# Altium PCB PCB1.PcbDoc
Units mil, origin at the board's own origin, x right, y up, seen from the top; angles counter-clockwise.
Board outline 5520 x 2975 mil, 2 copper layers (Top Layer, Bottom Layer); 37 components, 41 nets, 228 pads, 2 vias.
Unrouted connection lines stored in the file: 2.
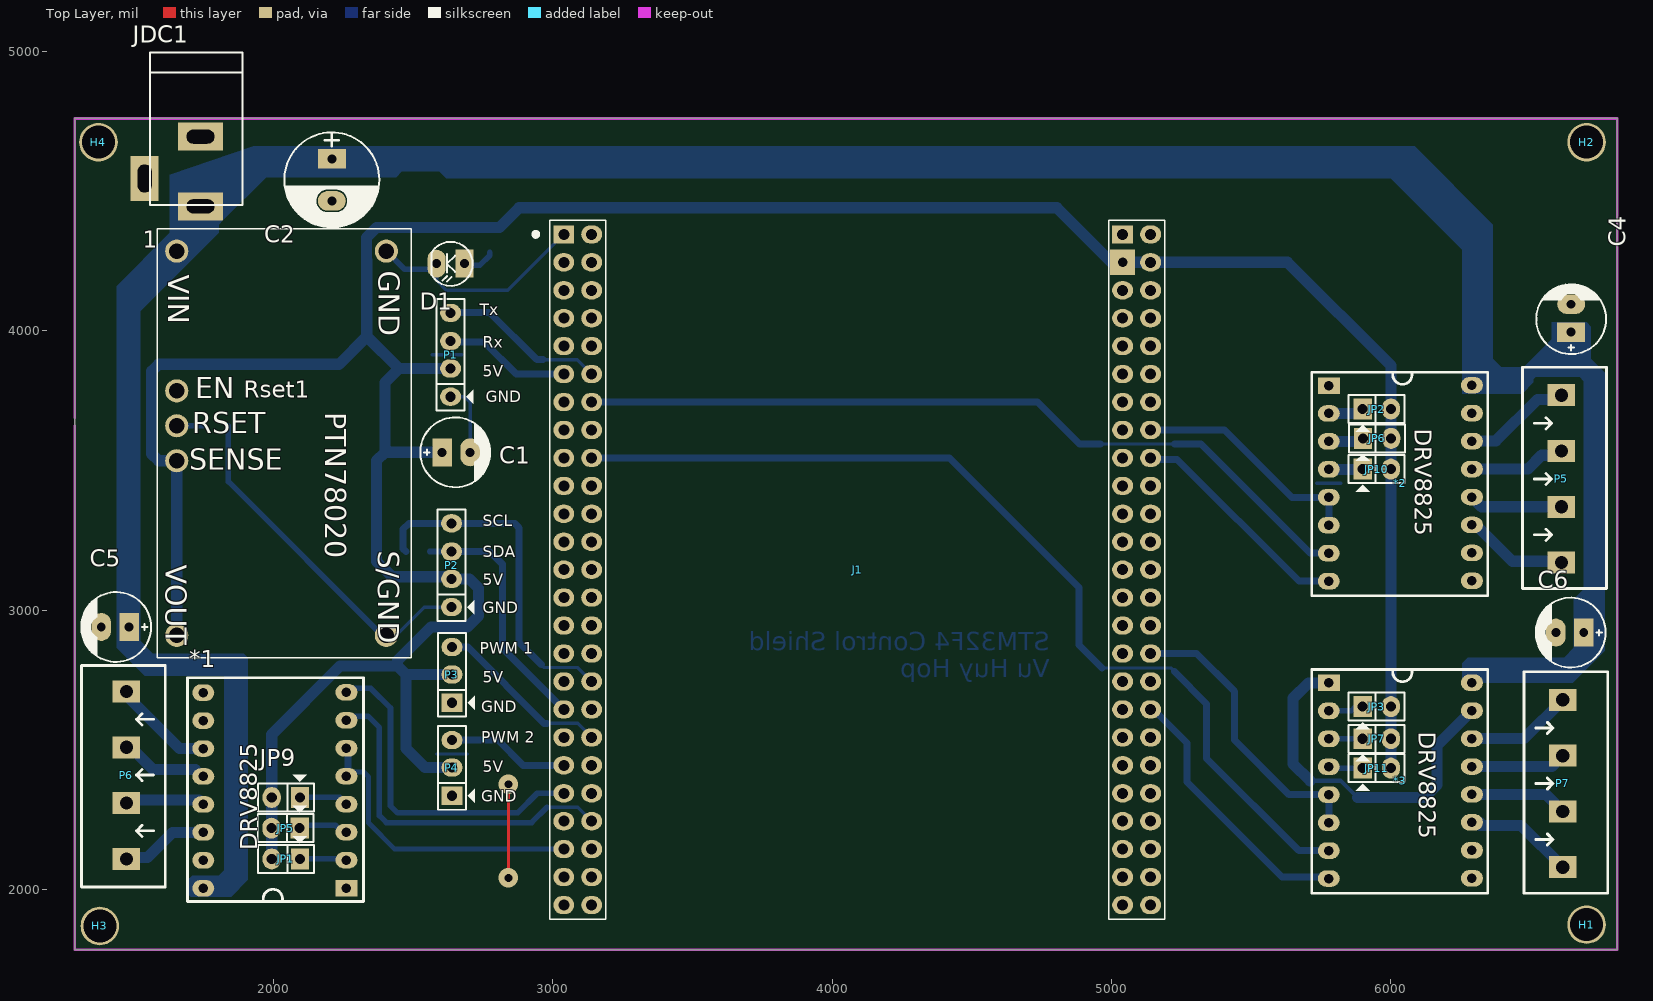
[diagram p0: Top Layer view]
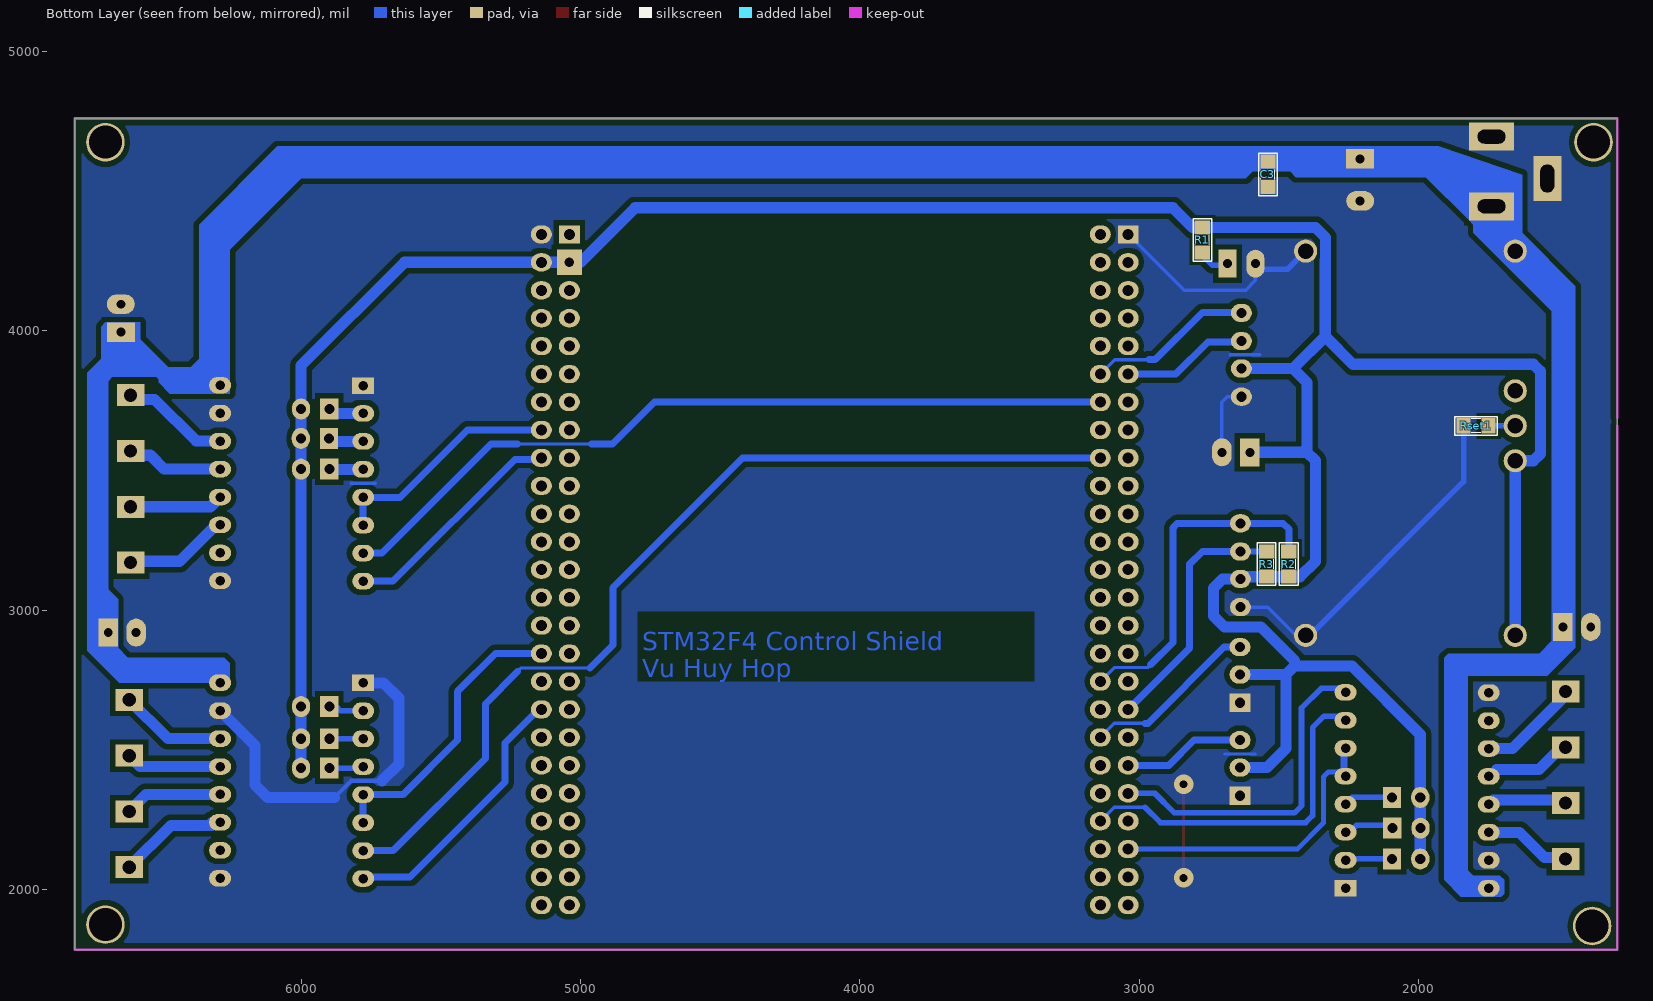
[diagram p1: Bottom Layer view, seen from below]
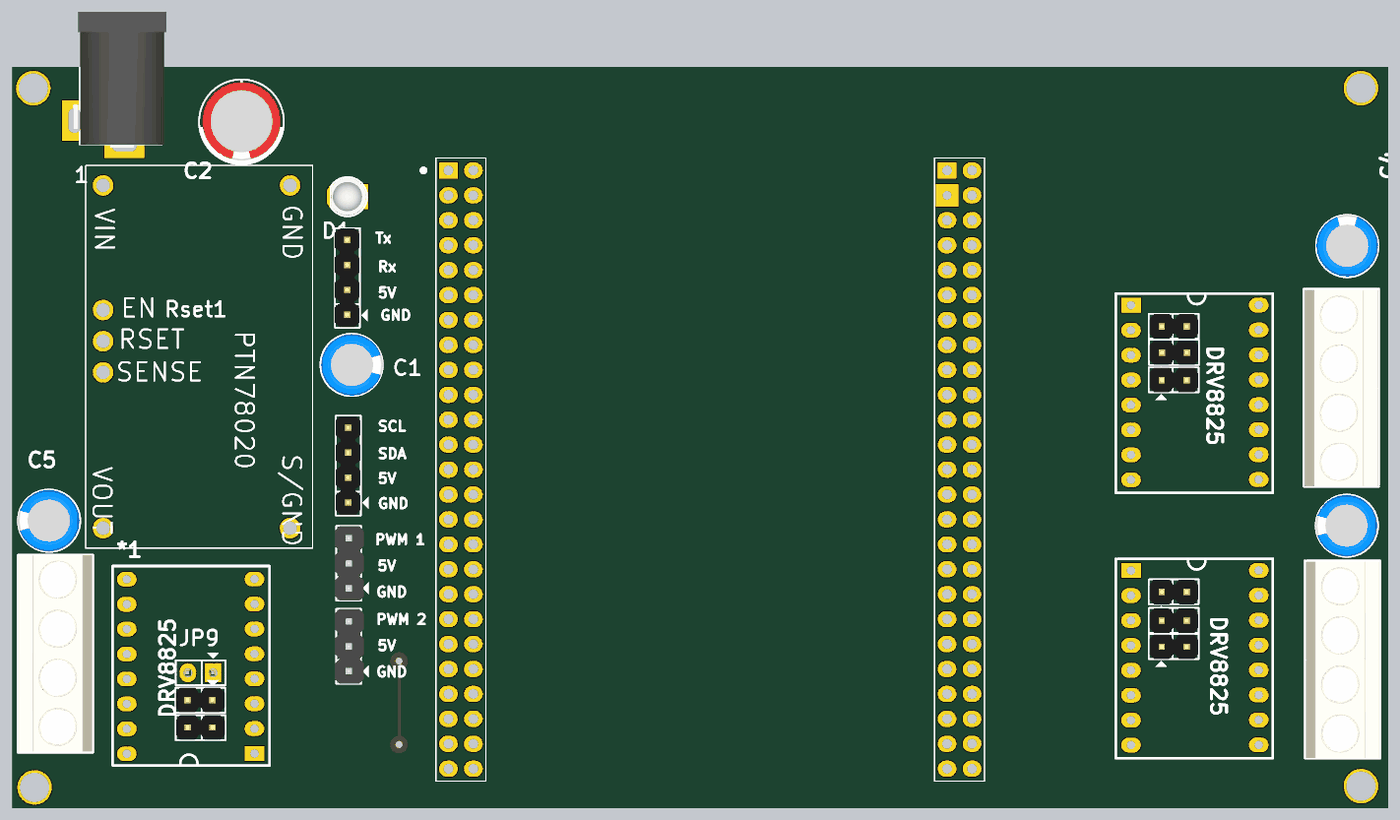
[diagram p2: 3D render of the assembled board from above, using the file's embedded part models]
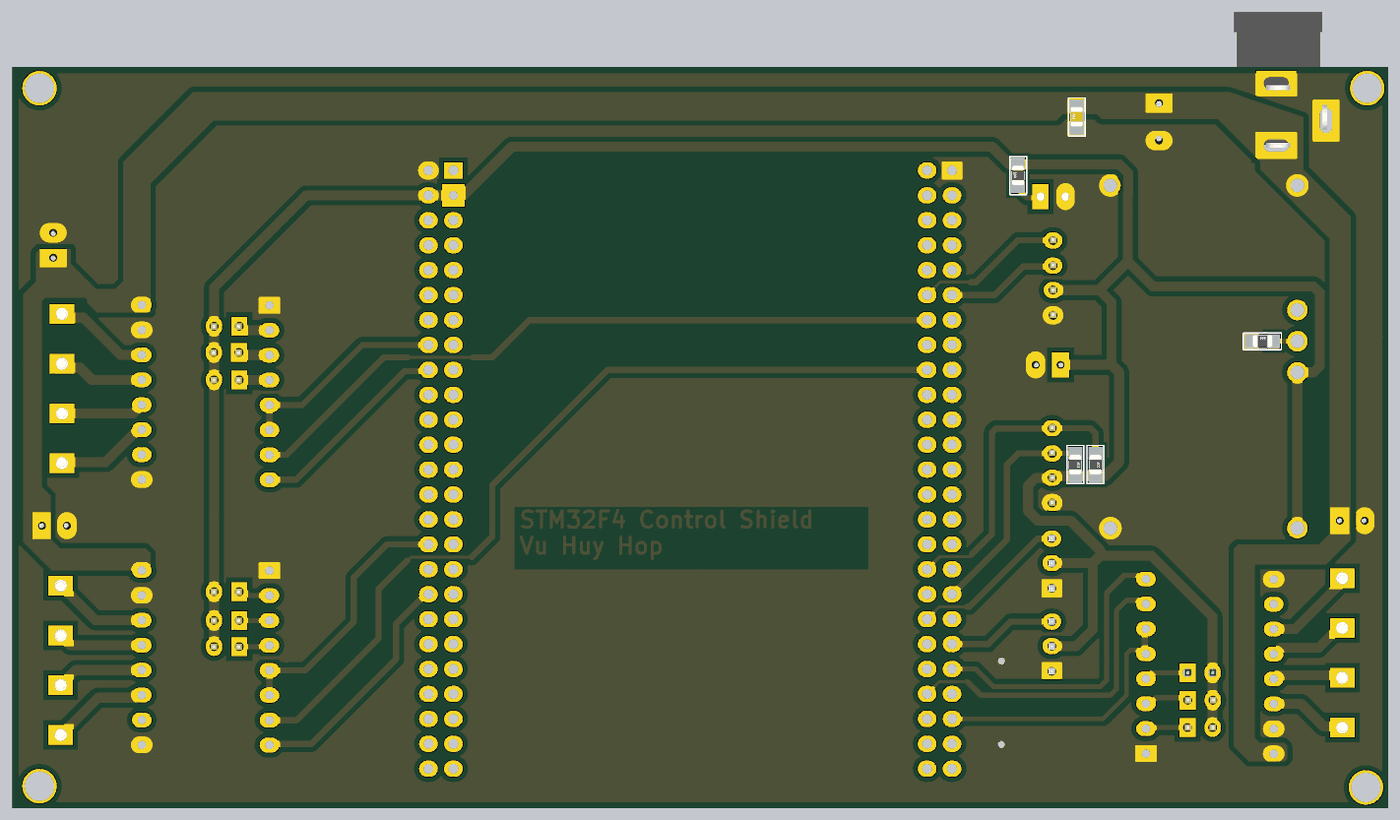
[diagram p3: 3D render of the assembled board from below, using the file's embedded part models]

## Layer stack, top to bottom
Top Solder: solder mask 0.4, Solder Resist, Dk 3.5
Top Layer: signal copper 1.4
Dielectric 1: dielectric 12.6, FR-4, Dk 4.8
Bottom Layer: signal copper 1.4
Bottom Solder: solder mask 0.4, Solder Resist, Dk 3.5

## Board outline
1290,1785 6810,1785 6810,4760 1290,4760

## Design rules (kind name [scope] priority, off if disabled: settings)
Clearance [All] p1: gap=20 ignorepadtopadclearanceinfootprint=FALSE except(0: Arc-Hole Track-Hole SMDPad-Hole THPad-Hole Via-Hole Text-Hole; 10: Arc-Arc Arc-Track Arc-SMDPad Arc-THPad Arc-Via Arc-Text Track-Track Track-SMDPad Track-THPad Track-Via Track-Text SMDPad-SMDPad SMDPad-THPad SMDPad-Via SMDPad-Text THPad-THPad THPad-Via THPad-Text Via-Via Via-Text Text-Text; 15: Fill-Text Fill-Hole Poly-Text Poly-Hole Region-Text Region-Hole)
ComponentClearance [All] p1 off: gap=10 collisioncheckmode=3 verticalgap=10 showdistances=FALSE
HoleSize [All] p1: absolutevalues=TRUE maxlimit=200 minlimit=1 maxpercent=80.000 minpercent=20.000
MinimumSolderMaskSliver [All] p1: minsoldermaskwidth=1
PlaneConnect [All] p1: planeconnectstyle=Direct reliefexpansion=20 reliefentries=4 reliefconductorwidth=10 reliefairgap=10
PolygonConnect [All] p1: connectstyle=Direct reliefconductorwidth=10 reliefentries=4 polygonreliefangle="90 Angle" airgapwidth=10
RoutingVias [All] p1: holewidth=28 width=50 viastyle="Through Hole" minholewidth=28 minwidth=50 maxholewidth=28 maxwidth=70
SilkToSilkClearance [All] p1: silktosilkclearance=1
SilkToSolderMaskClearance [IsPad] p1: minsilkscreentomaskgap=1 clearancetoexposedcopper=TRUE
SolderMaskExpansion [All] p1: expansion=4
Width [All] p1: maxlimit=40 minlimit=12 preferedwidth=20 minimp=50.000000 maximp=50.000000 favimp=50.000000
24 further rules are at their usual default settings.

## Components (designator, comment, footprint, x,y, rotation, side; value= is the part's Value field where it differs from the comment)
1 "PTN78020WAD" PTN78020WAD 1585,4365 r270 top
*1 "DRV8825" DRV8825 2263.19,2008.19 r90 top
*2 "DRV8825" DRV8825 5776.81,3801.81 r270 top
*3 "DRV8825" DRV8825 5776.81,2737.5 r270 top
C1 "Cap Pol" CP1/2.5 2605,3565 r0 top value=470uF
C2 "Cap Pol" CP1.5/3.4 2210,4615 r270 top value=470uF
C3 "Cap Non-Pol SMD" CAP-SM-0805 2540,4515 r90 bottom value=100pF
C4 "Cap Pol" CP1/2.5 6645,3995 r90 top value=470uF
C5 "Cap Pol" CP1/2.5 1485,2940 r180 top value=470uF
C6 "Cap Pol" CP1/2.5 6690,2920 r180 top value=470uF
D1 "LED" LED-3mm 2685,4240 r180 top
H1 "Hole" "LO KHOAN 3MM" 6700,1875 r0 top
H2 "Hole" "LO KHOAN 3MM" 6700,4675 r0 top
H3 "Hole" "LO KHOAN 3MM" 1380,1870 r0 top
H4 "Hole" "LO KHOAN 3MM" 1375,4675 r0 top
J1 "STM32F4DISCOVERY" STMICROELECTRONICS_STM32F4DISCOVERY_STM32F4DISCOVERY(Primary) 3040,4345 r0 top
JDC1 "Jac DC" DC-IN 1640,4570 r270 top
JP1 "Jumper 2" JP2 2096,2110 r180 top
JP2 "Jumper 2" JP2 5899,3720 r0 top
JP3 "Jumper 2" JP2 5899,2655 r0 top
JP5 "Jumper 2" JP2 2095,2220 r180 top
JP6 "Jumper 2" JP2 5900,3615 r0 top
JP7 "Jumper 2" JP2 5899,2540 r0 top
JP9 "Jumper 2" JP2 2096,2330 r180 top
JP10 "Jumper 2" JP2 5899,3505 r0 top
JP11 "Jumper 2" JP2 5899,2435 r0 top
P1 "Header 4" JP4 2635,3864 r90 top
P2 "Header 4" JP4 2638.5,3111 r90 top
P3 "Header 3" JP3 2640,2769 r90 top
P4 "Header 3" JP3 2640,2436 r90 top
P5 "Domino 4" "DOMINO 4 -5mm" 6610,3769.5 r270 top
P6 "Domino 4" "DOMINO 4 -5mm" 1475,2110 r90 top
P7 "Domino 4" "DOMINO 4 -5mm" 6615,2679.5 r270 top
R1 "Res SMD" RES-SM-0805 2775,4280 r90 bottom value=4K7
R2 "Res SMD" RES-SM-0805 2465,3210 r270 bottom value=4K7
R3 "Res SMD" RES-SM-0805 2545,3210 r270 bottom value=4K7
Rset1 "Res SMD" RES-SM-0805 1840,3660 r180 bottom

## Footprints (in the part's own frame and the unit in brackets; to place one, negate y for a bottom-side part, rotate by r counter-clockwise, add the part's x,y. Pads: shape width x height; smd on the part's side, far side on the other; paste and mask are expansions set on the pad)
CAP-SM-0805 [mil]
  rect 50x55 smd: 1(0,0) 2(90,0)
  silkscreen extent -32,-34 121,33, body extent 6,-25 84,25, height 31
CP1.5/3.4 [mil] "Tu hoa 220->470uF,16V, 470uF/16V,25V"
  rect 70x100 hole 32: 1(0,0)
  oval 70x100 hole 32: 2(150,0)
  silkscreen extent -95,-170 245,170, body extent -85,-157 230,157, height 446
CP1/2.5 [mil] "Tu hoa 33 >100 uF,50V, 220uF/16V,25V"
  rect 70x100 hole 32: 1(0,0)
  oval 70x100 hole 32: 2(100,0)
  silkscreen extent -78,-125 172,125, body extent -76,-124 172,124, height 422
DC-IN [mil] "Jac DC input"
  rect 100x160 hole 50 slot 100 at 90 deg: 1(125,100) 2(-125,100)
  rect 160x100 hole 50 slot 100 at 0 deg: 3(25,-100)
  silkscreen extent -425,-80 120,250, body extent -410,-105 134,269, height 434
"DOMINO 4 -5mm" [mm]
  rect 2x2.5 hole 1.2: 1(0,0) 2(5.08,0) 3(10.147,0) 4(15.215,0)
  silkscreen extent -2.54,-3.53 17.58,4.09, body extent -2.43,-3.46 17.57,4.04, height 10
DRV8825 [mm]
  rect 1.5x2 hole 0.864: 1(-0.058,0.023)
  oval 1.5x2 hole 0.864: 2(2.482,0.023) 3(5.022,0.023) 4(7.562,0.023) 5(10.102,0.023) 6(12.642,0.023) 7(15.182,0.023) 8(17.722,0.023) 9(-0.081,13.035) 10(2.459,13.035) 11(4.999,13.035) 12(7.539,13.035) 13(10.079,13.035) 14(12.619,13.035) 15(15.159,13.035) 16(17.699,13.035)
  silkscreen extent -1.27,-1.52 19.05,14.48
JP2 [mil]
  rect 65x75 hole 36: 1(0,0)
  oval 65x75 hole 36: 2(101,0)
  silkscreen extent -50,-81 150,50, body extent -48,-50 148,48, height 323
JP3 [mil] "Jumper 3"
  rect 65x75 hole 36: 1(-100,0)
  oval 65x75 hole 36: 2(1,0) 3(99,0)
  silkscreen extent -150,-81 150,50, body extent -150,-60 150,55, height 355
JP4 [mil] "Jumper 4"
  oval 65x75 hole 36: 1(-100,0) 2(1,0) 3(99,0) 4(200,0)
  silkscreen extent -150,-81 250,50, body extent -148,-48 248,50, height 323
LED-3mm [mil] "LED 2 PIN, 3ly Only colour"
  rect 65x100 hole 32: 1(0,0)
  oval 65x100 hole 32: 2(100,0)
  silkscreen extent -29,-78 118,79, body extent -25,-75 113,75, height 217
"LO KHOAN 3MM" [mil]
  round 138 hole 118.1: 1(0,0)
PTN78020WAD [mm]
  round 2.1 hole 1.4: 1(2.032,20.828) 2(2.032,1.778) 3(14.732,1.778) 4(17.907,1.778) 5(21.082,1.778) 6(36.957,1.778) 7(36.957,20.828)
  silkscreen extent 0,0 38.99,23.11
RES-SM-0805 [mil]
  rect 50x55 smd: 1(0,0) 2(90,0)
  silkscreen extent -32,-34 121,33, body extent 6,-25 84,25, height 31
STMICROELECTRONICS_STM32F4DISCOVERY_STM32F4DISCOVERY(Primary) [mil]
  rect 75x65 hole 39.37: P1(0,0) P51(2000,0)
  oval 75x65 hole 39.37: P2(100,0) P3(0,-100) P4(100,-100) P5(0,-200) P6(100,-200) P7(0,-300) P8(100,-300) P9(0,-400) P10(100,-400) P11(0,-500) P12(100,-500) P13(0,-600) P14(100,-600) P15(0,-700) P16(100,-700) P17(0,-800) P18(100,-800) P19(0,-900) P20(100,-900) P21(0,-1000) P22(100,-1000) P23(0,-1100) P24(100,-1100) P25(0,-1200) P26(100,-1200) P27(0,-1300) P28(100,-1300) P29(0,-1400) P30(100,-1400) P31(0,-1500) P32(100,-1500) P33(0,-1600) P34(100,-1600) P35(0,-1700) P36(100,-1700) P37(0,-1800) P38(100,-1800) P39(0,-1900) P40(100,-1900) P41(0,-2000) P42(100,-2000) P43(0,-2100) P44(100,-2100) P45(0,-2200) P46(100,-2200) P47(0,-2300) P48(100,-2300) P49(0,-2400) P50(100,-2400) P52(2100,0) P54(2100,-100) P55(2000,-200) P56(2100,-200) P57(2000,-300) P58(2100,-300) P59(2000,-400) P60(2100,-400) P61(2000,-500) P62(2100,-500) P63(2000,-600) P64(2100,-600) P65(2000,-700) P66(2100,-700) P67(2000,-800) P68(2100,-800) P69(2000,-900) P70(2100,-900) P71(2000,-1000) P72(2100,-1000) P73(2000,-1100) P74(2100,-1100) P75(2000,-1200) P76(2100,-1200) P77(2000,-1300) P78(2100,-1300) P79(2000,-1400) P80(2100,-1400) P81(2000,-1500) P82(2100,-1500) P83(2000,-1600) P84(2100,-1600) P85(2000,-1700) P86(2100,-1700) P87(2000,-1800) P88(2100,-1800) P89(2000,-1900) P90(2100,-1900) P91(2000,-2000) P92(2100,-2000) P93(2000,-2100) P94(2100,-2100) P95(2000,-2200) P96(2100,-2200) P97(2000,-2300) P98(2100,-2300) P99(2000,-2400) P100(2100,-2400)
  rect 90x90 hole 35: P53(2000,-100)
  silkscreen extent -108,-2450 2150,50

## Part data
1: "6-A Wide-Input Voltage Adjustable Switching egulator 7-Through-Hole Module -40 to 85", Package="DIP-7 Texas Instruments", Availability=Unavailable, MF="Texas Instruments", MP=PTN78020WAD, Price=None, SnapEDA_Link=https://www.snapeda.com/parts/PTN78020WAD/Texas%20Instruments/view-part/?ref=snap
C1 C2 C4 C5 C6: "Polarized Capacitor (Radial)"
C3: "Capacitor"
H1 H2 H3 H4: "Hole 3mm"
J1: "Development kit: ARM ST; pin strips, pin header; No.of", Package=None, Availability=Unavailable, MF=STMicroelectronics, MP=STM32F4DISCOVERY, Price=None, SnapEDA_Link=https://www.snapeda.com/parts/STM32F4DISCOVERY/STMicroelectronics/view-part/?ref=snap
JDC1: library part DCIN, "Jac DC input"
P1 P2: "Header, 4-Pin", LatestRevisionDate=17-Jul-2002, LatestRevisionNote="Re-released for DXP Platform.", Publisher="Altium Limited"
P3 P4: "Header, 3-Pin", LatestRevisionDate=17-Jul-2002, LatestRevisionNote="Re-released for DXP Platform.", Publisher="Altium Limited"
P5 P6 P7: "Domino 4-Pin", LatestRevisionDate=17-Jul-2002, LatestRevisionNote="Re-released for DXP Platform.", Publisher="Altium Limited"
R1 R2 R3 Rset1: "Resistor"
  Rset1: 1%=21k

## Via types
v1: diameter 70, hole 28, Top Layer to Bottom Layer, tented both sides, 2 vias

## Nets (pads, with @x,y where several pads share a name; then routed paths per layer and width w, separated by ;. In a path a pad name is that pad's centre, name@x,y a point inside that pad or via, vN(x,y) a via of type N, cw(c..) or ccw(c..) an arc to the next point about the centre after c; other vN are vias at no path point)
5VDC: 1.5 1.6 C1.1 J1.P53 J1.P54 JP1.2 JP2.2 JP3.2 JP5.2 JP6.2 JP7.2 JP9.2 JP10.2 JP11.2 P1.2 P2.2 P3.2 P4.2 R1.2 R2.2 R3.2 | length 11398.9
  Bottom Layer w0: R3.2 R3.2@2550,3120
  Bottom Layer w20: P2.2@2630.5,3120 P2.2
  Bottom Layer w40: 1.6 1.5 1590,3535 1565,3560 1565,3855 1590,3880 2235,3880 2335,3980 ; JP1.2 JP9.2 1995,2555 2240,2800 2445,2800 ; R3.2 R2.2 2425,3120 2370,3175 2370,3535 2400,3565 2400,3580 ; R3.2@2550,3120 P2.2@2630.5,3120 ; C1.1 2415,3565 2400,3580 ; P2.2 2703,3112 2735,3080 2735,2980 2695,2940 2565,2940 2445,2820 2445,2800 ; P1.2@2638.5,3865 P1.2 2450,3865 ; P4.2 2543,2437 2475,2505 2475,2770 ; P3.2 2475,2770 ; JP11.2@6000,2445 JP7.2 JP3.2 JP10.2 JP2.2 6000,3875 5630,4245 J1.P54 J1.P53 5000,4245 4805,4440 2880,4440 2810,4370 R1.2 2370,4370 2333.66,4333.66 2333.66,4254.11 2335,4252.77 2335,3980 ; 2335,3980 2450,3865 ; 2400,3580 2400,3815 2450,3865 ; 2445,2800 2475,2770
12VDC: 1.2 *1.9 *2.9 *3.9 C2.1 C3.2 C4.1 C5.1 C6.1 JDC1.1 | length 10345.6
  Bottom Layer w40: *1.9@1755,2020 1825,2020 1870,2065 1870,2810 1860,2820 1530,2820 1485,2865 C5.1 1485,4115 1.2 1725,4355 1725,4520 1800,4595 2386.26,4595 ; 2406.26,4595 6035,4595 6290,4340 *2.9 6460,3805 6515,3860 6645,3860 ; *3.9 6334.31,2785 6605,2785 6675,2855 ; 6645,3855 6645,3860 ; C4.1 6645,3860 ; 6682.5,2862.5 6675,2855 ; C6.1@6707.5,2902.5 C6.1@6707.5,2920 ; 6645,3860 6655,3860 6660,3855 6730,3855 6730,3050 6690,3010 C6.1 6675,2905 6675,2855
GND: 1.1 1.7 *1.1 *1.10 *1.16 *2.1 *2.10 *2.16 *3.1 *3.10 *3.16 C1.2 C2.2 C3.1 C4.2 C5.2 C6.2 D1.2 J1.P1 J1.P52 JDC1.2 JDC1.3 P1.1 P2.1 P3.1 P4.1 Rset1.1 | length 4262.3
  Top Layer w12: v1(2842,2042) v1(2842,2377)
  Bottom Layer w12: 1.7 2440,2910 2541,3011 P2.1 ; 2570,3914.5 2674.5,3914.5 2675,3915 ; 2584.5,2485.5 2694.5,2485.5 ; D1.2 2585,4220 2585,4180 2620,4145 2840,4145 J1.P1 ; P1.1 2686,3764 2705,3745 C1.2 ; 5735,3455 5820,3455
  Bottom Layer w15: 5710,2390 5820,2390 5880,2330
  Bottom Layer w20: Rset1.1 1840,3460 1.7@2397.5,2902.5 ; 1.1 2470,4220 D1.2@2585,4220
  Bottom Layer w40: 5710,2390 5650,2450 5650,2685 5704.79,2739.79 *3.1 ; 5880,2330 6120,2330 6165,2375 6165,2515.69 *3.10
M1_0: *1.2 JP1.1 | length 181.6
  Bottom Layer w20: JP1.1 2266.37,2110 2267.27,2110.89 *1.2@2267.27,2120.89
M1_1: *1.3 JP5.1 | length 145.2
  Bottom Layer w20: JP5.1 2105,2230 2223.16,2230 *1.3@2232.27,2220.89
M1_2: *1.4 JP9.1 | length 175
  Bottom Layer w20: JP9.1 2238.16,2330 2247.27,2320.89 *1.4@2267.27,2320.89
M2_0: *2.2 JP2.1 | length 127.8
  Bottom Layer w40: *2.2 5883.11,3704.11 JP2.1
M2_1: *2.3 JP6.1 | length 126.8
  Bottom Layer w40: *2.3 5889.11,3604.11 JP6.1
M2_2: *2.4 JP10.1 | length 121.6
  Bottom Layer w40: *2.4 5898.11,3504.11 JP10.1
M3_0: *3.2 JP3.1 | length 102.6
  Bottom Layer w20: *3.2 5858.79,2639.79 JP3.1@5874,2655
M3_1: *3.3 JP7.1 | length 98.4
  Bottom Layer w20: *3.3 5868.79,2539.79 JP7.1@5874,2545
M3_2: *3.4 JP11.1 | length 98.3
  Bottom Layer w20: *3.4 5782.53,2435 JP11.1@5874,2435
Net1_4: 1.4 Rset1.2 | length 95
  Bottom Layer w20: 1.4 Rset1.2
Net*1_5: *1.5 *1.6 J1.P45 | length 1083.7
  Bottom Layer w18: *1.5@2267.27,2420.89 2324.11,2420.89 2341,2404 2341,2239 2435,2145 J1.P45
  Bottom Layer w25: *1.5@2267.27,2420.89 *1.6@2267.27,2520.89
Net*1_8: *1.8 J1.P41 | length 1191.4
  Bottom Layer w20: *1.8@2267.27,2720.89 2349.11,2720.89 2420,2650 2420,2300 2445,2275 2875,2275 2945,2345 J1.P41
Net*1_11: *1.11 P6.1 | length 327.6
  Bottom Layer w40: P6.1 1480,2115 1550,2115 1640,2205 *1.11 1755,2205 *1.11@1755,2213.21
Net*1_12: *1.12 P6.2 | length 281.4
  Bottom Layer w40: P6.2@1475,2320.5 1734.5,2320.5 *1.12
Net*1_13: *1.13 P6.3 | length 285
  Bottom Layer w40: P6.3@1475,2520 1480,2520 1570,2430 1722.73,2430
Net*1_14: *1.14 P6.4 | length 366.8
  Bottom Layer w40: P6.4 1475,2695 1665,2505 1735,2505 *1.14@1745,2495
Net*2_5: *2.5 *2.6 J1.P66 | length 837.5
  Bottom Layer w25: J1.P66 5405,3645 5645.89,3404.11 *2.5 *2.6
Net*2_8: *2.8 J1.P68 | length 820.4
  Bottom Layer w25: J1.P68 5145,3540 5235,3540 5670.89,3104.11 *2.8
Net*2_11: *2.11 P5.1 | length 391.9
  Bottom Layer w40: *2.11 6375,3605 6524.5,3754.5 P5.1@6620,3754.5
Net*2_12: *2.12 P5.2 | length 350.5
  Bottom Layer w40: *2.12 6490,3505 6539.5,3554.5 P5.2@6620,3554.5
Net*2_13: *2.13 P5.3 | length 350.7
  Bottom Layer w40: *2.13 6325,3370 6605,3370 P5.3@6620,3355
Net*2_14: *2.14 P5.4 | length 391.9
  Bottom Layer w40: *2.14 6305,3305 6435,3175 6600.5,3175 P5.4@6620,3155.5
Net*3_5: *3.5 *3.6 J1.P82 | length 1049.5
  Bottom Layer w25: J1.P82 5305,2845 5440,2710 5440,2535 5635.21,2339.79 *3.5 *3.6
Net*3_8: *3.8 J1.P86 | length 970.4
  Bottom Layer w25: J1.P86 5150,2645 5270,2525 5270,2385 5610,2045 5772.53,2045 *3.8
Net*3_11: *3.11 P7.1 | length 382.5
  Bottom Layer w40: *3.11 6476.19,2540.69 P7.1
Net*3_12: *3.12 P7.2 | length 341.1
  Bottom Layer w40: *3.12 6576.19,2440.69 P7.2
Net*3_13: *3.13 P7.3 | length 350.1
  Bottom Layer w40: *3.13 6554.31,2340.69 P7.3
Net*3_14: *3.14 P7.4 | length 397.6
  Bottom Layer w40: *3.14 6319.29,2240.69 6319.29,2230 6465.5,2230 P7.4
NetD1_1: D1.1 R1.1 | length 124.9
  Bottom Layer w20: D1.1@2685,4210 2710,4235 2740,4235 2775,4270 R1.1
"PWM 1": J1.P38 P3.3 | length 633.8
  Bottom Layer w12: 2980,2595 3090,2595 J1.P38
  Bottom Layer w25: P3.3 2697,2868 2970,2595 2980,2595
"PWM 2": J1.P39 P4.3 | length 437.3
  Bottom Layer w25: P4.3 2805,2535 2895,2445 J1.P39
RX: J1.P12 P1.4 | length 592.6
  Bottom Layer w12: 2965,3896.5 3088.5,3896.5 J1.P12
  Bottom Layer w25: P1.4@2638.5,4065 2775,4065 2943.5,3896.5 2965,3896.5
SCL: J1.P34 P2.4 R2.1 | length 1292
  Bottom Layer w12: 2960,2805 2970,2795 3090,2795 J1.P34
  Bottom Layer w25: R2.1@2475,3210 2465,3220 2465,3290 2486,3311 P2.4 2681.26,3311 ; P2.4@2631.26,3310 2865,3310 2880,3295 2880,2885 2960,2805
SDA: J1.P35 P2.3 R3.1 | length 889.8
  Bottom Layer w20: R3.1@2560,3210 2572,3210 P2.3
  Bottom Layer w25: P2.3 2775,3210 2820,3165 2820,2865 J1.P35
Tim3_ch1: *3.7 J1.P18 | length 3454.6
  Bottom Layer w12: 4966.5,2793.5 5211.5,2793.5 5225,2780
  Bottom Layer w25: J1.P18 4420.8,3545 4884.5,3081.3 4884.5,2875.5 4966.5,2793.5 ; 5225,2780 5340,2665 5340,2470 5670.21,2139.79 *3.7
Tim4_ch1: *1.7 J1.P44 | length 1258.5
  Bottom Layer w12: 2980,2295 3090,2295 J1.P44
  Bottom Layer w20: *1.7@2267.27,2620.89 2339.11,2620.89 2380,2580 2380,2265 2405,2240 2925,2240 2980,2295
Tim5_ch3: *2.7 J1.P14 | length 2861.8
  Bottom Layer w12: 4960,3595 5225,3595
  Bottom Layer w25: J1.P14 4735,3745 4885,3595 4960,3595 ; 5225,3595 5320,3595 5710.89,3204.11 *2.7
TX: J1.P11 P1.3 | length 449.1
  Bottom Layer w25: P1.3@2638.5,3960 2755,3960 2870,3845 J1.P11
pads on no net: 1.3 *1.15 *2.15 *3.15 H1.1 H2.1 H3.1 H4.1 J1.P2 J1.P3 J1.P4 J1.P5 J1.P6 J1.P7 J1.P8 J1.P9 J1.P10 J1.P13 J1.P15 J1.P16 J1.P17 J1.P19 J1.P20 J1.P21 J1.P22 J1.P23 J1.P24 J1.P25 J1.P26 J1.P27 J1.P28 J1.P29 J1.P30 J1.P31 J1.P32 J1.P33 J1.P36 J1.P37 J1.P40 J1.P42 J1.P43 J1.P46 J1.P47 J1.P48 J1.P49 J1.P50 J1.P51 J1.P55 J1.P56 J1.P57 J1.P58 J1.P59 J1.P60 J1.P61 J1.P62 J1.P63 J1.P64 J1.P65 J1.P67 J1.P69 J1.P70 J1.P71 J1.P72 J1.P73 J1.P74 J1.P75 J1.P76 J1.P77 J1.P78 J1.P79 J1.P80 J1.P81 J1.P83 J1.P84 J1.P85 J1.P87 J1.P88 J1.P89 J1.P90 J1.P91 J1.P92 J1.P93 J1.P94 J1.P95 J1.P96 J1.P97 J1.P98 J1.P99 J1.P100

## Polygon pours and split planes (outlines as drawn)
GND on Bottom Layer "GND_L02_P000" (solid, remove dead copper, pour order 0): 1290,4760 6790,4760 6790,1785 1290,1785

## Keep-outs
Keep-Out Layer:
  lines w10: 1290,3660 1290,1785 6810,1785 6810,4760 1290,4760 1290,3690

## Other copper
Bottom Layer:
  region net 12VDC: 1630,4395 1820,4395 1805,4380 1805,4350 1525,4070 1525,2890 1570,2845 1895,2845 1910,2830 1910,2035 1850,1975 1705,1975 1695,1985 1695,2035 1710,2050 1805,2050 1825,2070 1825,2765 1540,2765 1440,2865 1440,4160 1630,4350
  region net 12VDC: 1630,4395 1630,4558.95 1929.45,4660 6085,4660 6365,4380 6365,3900 6395,3870 6475,3870 6575,3970 6575,4030 6700,4030 6715,4015 6715,3900 6765,3850 6765,2855 6650,2740 6255,2740 6255,2810 6275,2830 6620,2830 6655,2865 6655,3040 6690,3075 6690,3820 6675,3835 6510,3835 6510,3815 6470,3775 6255,3775 6255,4290 6000,4545 2620,4545 2595,4570 2460,4570 2440,4550 1975,4550 1820,4395
  text "STM32F4 Control Shield / Vu Huy Hop" at 4780,2760 h65

## Silkscreen, mask and mechanical layers (free items; w line width, h text height)
Top Overlay:
  text "Tx" at 2740,4055 h40
  text "Rx" at 2750,3940 h40
  text "5V" at 2750,3835 h40
  text "GND" at 2760,3745 h40
  text "SCL" at 2750,3300 h40
  text "SDA" at 2750,3190 h40
  text "5V" at 2750,3090 h40
  text "GND" at 2750,2990 h40
  text "PWM 1" at 2740,2845 h40
  text "5V" at 2750,2740 h40
  text "GND" at 2745,2635 h40
  text "PWM 2" at 2745,2525 h40
  text "5V" at 2750,2420 h40
  text "GND" at 2745,2315 h40

## Dimensions
1290,1785 to 6810,1785 on Mechanical 1

## Text inside footprints (layer, text, board x,y; h text height)
1: Top Overlay "PTN78020" at 2186.31,3708.77 h73.82 r270; Top Overlay "VIN" at 1625.25,4199.7 h73.82 r270; Top Overlay "VOUT" at 1615.22,3163.13 h73.82 r270; Top Overlay "EN" at 1720.6,3758.14 h73.82; Top Overlay "RSET" at 1710.53,3632.99 h73.82; Top Overlay "SENSE" at 1700.6,3501.94 h73.82; Top Overlay "GND" at 2377.65,4214.53 h73.82 r270; Top Overlay "S/GND" at 2376.56,3212.98 h73.82 r270